# Altium PCB PCB1.PcbDoc
Units mil, origin at the board's own origin, x right, y up, seen from the top; angles counter-clockwise.
Board outline 6270 x 4720 mil, 2 copper layers (Top Layer, Bottom Layer); 25 components, 55 nets, 239 pads, 21 vias.
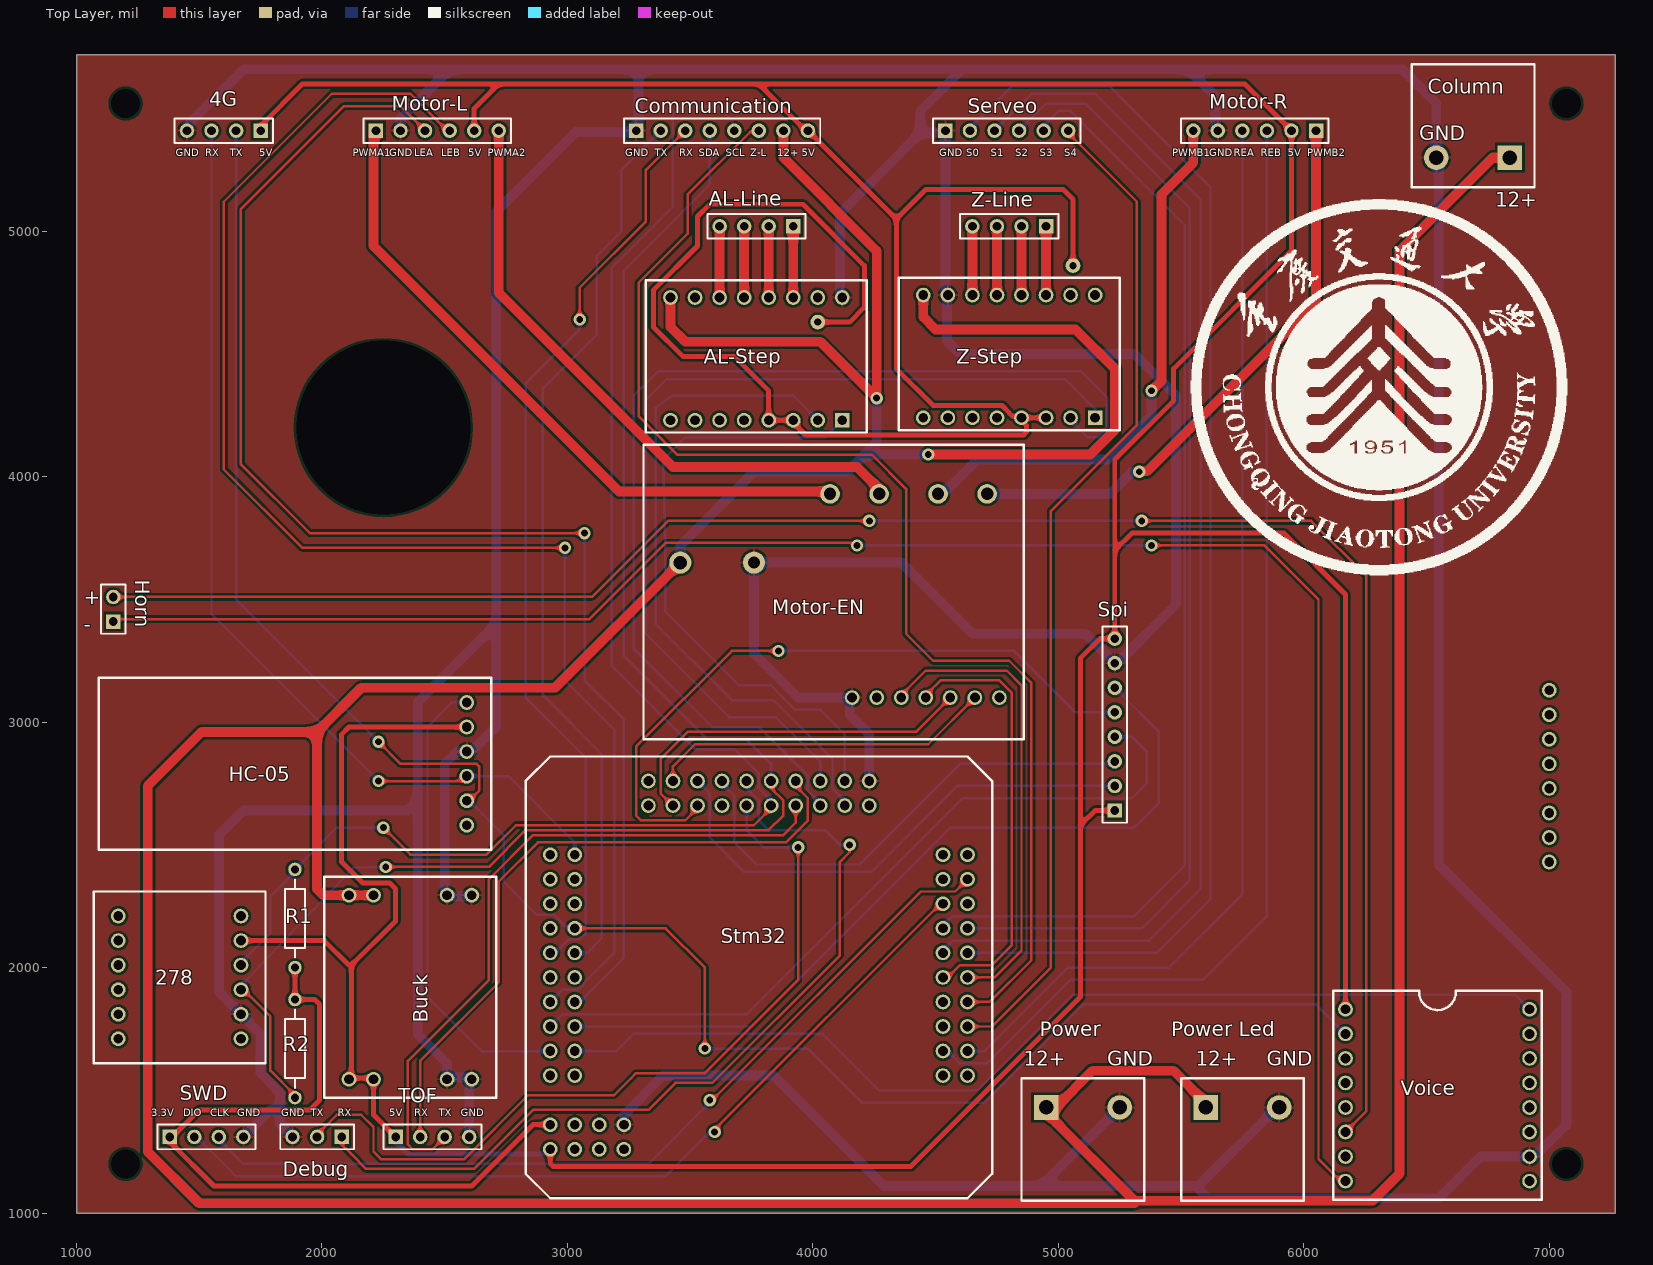
[diagram p0: Top Layer view]
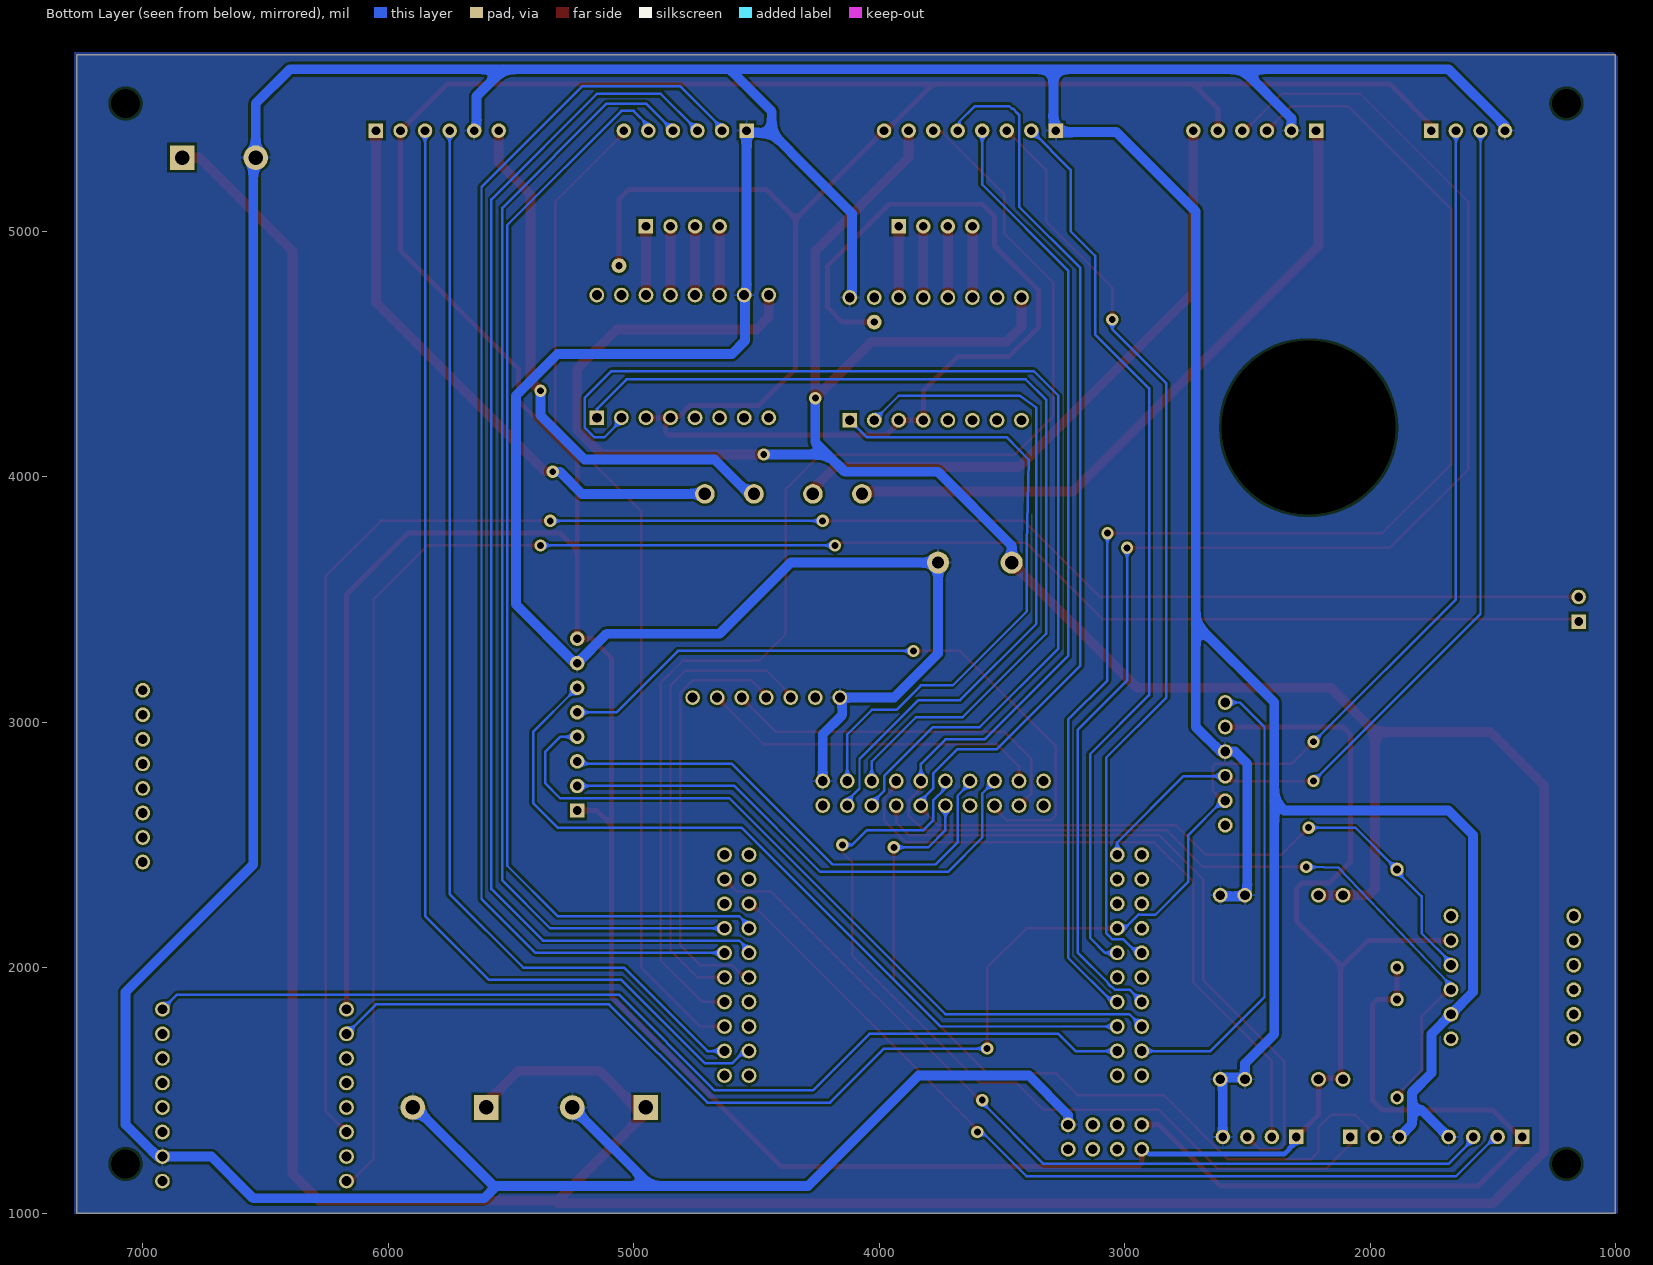
[diagram p1: Bottom Layer view, seen from below]

## Layer stack, top to bottom
Top Solder: solder mask 0.4, Solder Resist, Dk 3.5
Top Layer: signal copper 1.4
Dielectric 1: dielectric 12.6, FR-4, Dk 4.8
Bottom Layer: signal copper 1.4
Bottom Solder: solder mask 0.4, Solder Resist, Dk 3.5

## Board outline
1000,1000 1000,5720 7270,5720 7270,1000

## Design rules (kind name [scope] priority, off if disabled: settings)
Clearance [All] p1: gap=10 ignorepadtopadclearanceinfootprint=FALSE except(0: Arc-Hole Track-Hole SMDPad-Hole THPad-Hole Via-Hole Fill-Hole Poly-Hole Region-Hole Text-Hole)
PolygonConnect [All] p1: connectstyle=Relief reliefconductorwidth=10 reliefentries=4 polygonreliefangle="90 Angle" airgapwidth=10
RoutingVias [All] p1: holewidth=28 width=50 viastyle="Through Hole" minholewidth=28 minwidth=50 maxholewidth=28 maxwidth=50
SolderMaskExpansion [All] p1: expansion=4 istentingtop=FALSE
Width [All] p1: maxlimit=40 minlimit=10 preferedwidth=10 minimp=50.000000 maximp=50.000000 favimp=50.000000
30 further rules are at their usual default settings.

## Components (designator, comment, footprint, x,y, rotation, side; value= is the part's Value field where it differs from the comment)
4G "Header 4" HDR1X4 1750,5410 r180 top
278 "0" 278 1370,2310 r0 top
AL-Line "Header 4" HDR1X4 3920,5020 r180 top (schematic designator AL-LINE)
AL-Step "8825" 8825 3420,4230 r90 top (schematic designator AL-STEP)
Buck "buck" 5V 2310,2170 r0 top (schematic designator buck)
Column "column" "key - duplicate" 6840,5300 r180 top (schematic designator column)
Communication "Header 8" HDR1X8 3280,5410 r0 top (schematic designator COMMUNICATION)
Debug "Header 3" HDR1X3 2080,1310 r180 top (schematic designator test)
HC-05 "bluetooth" "blue key" 2490,2780 r180 top
Horn "Header 2" HDR1X2 1150,3410 r90 top (schematic designator horn)
Motor-EN "L298" L298N 4560,3730 r270 top (schematic designator MOTOR-EN)
Motor-L "Header 6" HDR1X6 2220,5410 r0 top (schematic designator MOTOR-L)
Motor-R "Header 6" HDR1X6 6050,5410 r180 top (schematic designator MOTOR-R)
Power "Header 2" "key - duplicate" 4950,1430 r0 top (schematic designator POWER)
"Power Led" "Header 2" "key - duplicate" 5600,1430 r0 top (schematic designator "POWER LED")
R1 "" AXIAL-0.4 1890,2200 r90 top value=4.7K
R2 "" AXIAL-0.4 1890,1670 r270 top value=4.7K
Serveo "Header 6" HDR1X6 4540,5410 r0 top (schematic designator serve)
Spi "Header 8" HDR1X8 5230,2640 r90 top (schematic designator SPI)
Stm32 "srm32" stm32 3530,2460 r0 top (schematic designator stm32)
SWD "Header 4" HDR1X4 1380,1310 r0 top
TOF "Header 4" HDR1X4 2300,1310 r0 top
Voice "yuyin1" horn 6270,1730 r0 top (schematic designator yuyin)
Z-Line "Header 4" HDR1X4 4950,5020 r180 top (schematic designator Z-LINE)
Z-Step "8825" 8825 4450,4240 r90 top (schematic designator Z-STEP)

## Footprints (in the part's own frame and the unit in brackets; to place one, negate y for a bottom-side part, rotate by r counter-clockwise, add the part's x,y. Pads: shape width x height; smd on the part's side, far side on the other; paste and mask are expansions set on the pad)
5V [mil]
  round 60 hole 40: vin+(-200,125) vin+(-100,125) vin-(200,125) vin-(300,125) vout+(-200,-625) vout+(-100,-625) vout-(200,-625) vout-(300,-625)
  silkscreen extent -300,-700 400,200
278 [mil]
  round 60 hole 40: D0(-200,-100) D1(-200,-600) D2(300,-100) D3(300,-600) GND(-200,-500) GND(300,-500) RX(-200,-300) SCL(300,-300) SDA(300,-400) TX(-200,-400) VCC(-200,-200) VCC(300,-200)
  silkscreen extent -300,-700 400,0
8825 [mil]
  round 60 hole 40: 1A(500,-400) 1B(500,-300) 2A(500,-500) 2B(500,-200) EN(0,0) FLT(500,-600) GND(500,-100) GND(500,-700) M0(0,-100) M1(0,-200) M2(0,-300) RST(0,-400) SLEP(0,-500) STEP(0,-600) VMOT(500,0)
  rect 60x60 hole 40: DIR(0,-700)
  silkscreen extent -50,-800 570,100
AXIAL-0.4 [mm] "Axial Device, Thru-Hole; 2 Leads; 0.4 in Pin Spacing"
  round 1.4 hole 0.85: 1(-5.08,0) 2(5.08,0)
  silkscreen extent -4.06,-1.02 4.06,1.02
"blue key" [mil]
  round 60 hole 40: EN(-100,-300) GND(-100,-100) RX(-100,100) STATE(-100,200) TX(-100,0) VCC(-100,-200)
  silkscreen extent -200,-400 1400,300
HDR1X2 [mm] "Connector; Header; 2 Position"
  rect 1.5x1.5 hole 0.9: 1(0,0)
  round 1.5 hole 0.9: 2(2.54,0)
  silkscreen extent -1.27,-1.27 3.81,1.27
HDR1X3 [mm] "Connector; Header; 3 Position"
  rect 1.5x1.5 hole 0.9: 1(0,0)
  round 1.5 hole 0.9: 2(2.54,0) 3(5.08,0)
  silkscreen extent -1.27,-1.27 6.35,1.27
HDR1X4 [mm] "Connector; Header; 4 Position"
  rect 1.5x1.5 hole 0.9: 1(0,0)
  round 1.5 hole 0.9: 2(2.54,0) 3(5.08,0) 4(7.62,0)
  silkscreen extent -1.27,-1.27 8.89,1.27
HDR1X6 [mm] "Connector; Header; 6 Position"
  rect 1.5x1.5 hole 0.9: 1(0,0)
  round 1.5 hole 0.9: 2(2.54,0) 3(5.08,0) 4(7.62,0) 5(10.16,0) 6(12.7,0)
  silkscreen extent -1.27,-1.27 13.97,1.27
HDR1X8 [mm] "Connector; Header; 8 Position"
  rect 1.5x1.5 hole 0.9: 1(0,0)
  round 1.5 hole 0.9: 2(2.54,0) 3(5.08,0) 4(7.62,0) 5(10.16,0) 6(12.7,0) 7(15.24,0) 8(17.78,0)
  silkscreen extent -1.27,-1.27 19.05,1.27
horn [mil]
  round 60 hole 40: ADKEY1(650,-300) ADKEY2(650,-200) BUSY(650,100) DACL(-100,-300) DACR(-100,-200) GND(-100,-500) GND(650,-500) IO1(650,-600) IO2(650,-400) RX(-100,0) SPK+(-100,-400) SPK-.(-100,-600) TX(-100,-100) USB+(650,-100) USB-(650,0) VCC(-100,100)
  silkscreen extent -150,-675 700,176
"key - duplicate" [mm]
  rect 2.54x2.54 hole 1.5: 12V(0,0)
  round 2.54 hole 1.5: GND(7.62,0)
  silkscreen extent -2.54,-9.65 10.16,3.05
L298N [mil]
  round 60 hole 40: 3.3(630,-300) D0(630,-200) D1(630,-100) D2(630,0) D3(630,100) GND(630,-400) VT(630,200)
  round 90 hole 55: 12+(80,-1100)
  round 90 hole 50: GND(80,-800)
  round 80 hole 50: PWMA1(-200,-490) PWMA2(-200,-290) PWMB1(-200,-50)
  round 80 hole 50 mask+4: PWMB2(-200,150)
  silkscreen extent -400,-1250 800,300
stm32 [mil]
  round 60 hole 40: 3.3V(-600,-1100) 3.3V(-200,200) 3.3V(1100,-900) 5V(-600,-1200) 5V(700,200) 5V(1100,0) A0(1100,-800) A1(1000,-800) A2(1100,-700) A3(1000,-700) A4(1100,-600) A5(1000,-600) A6(1100,-500) A7(1000,-500) A8(1100,-400) A9(1000,-400) A10(1100,-300) A11(1000,-300) A12(1100,-200) A13(1000,-200) A14(1100,-100) A15(1000,-100) B0(-100,200) B1(-100,300) B2(0,200) B3(0,300) B4(100,200) B5(100,300) B6(200,200) B7(200,300) B8(300,200) B9(300,300) B10(400,200) B11(400,300) B12(500,200) B13(500,300) B14(600,200) B15(600,300) C0(-500,-900) C1(-600,-900) C2(-500,-800) C3(-600,-800) C4(-500,-700) C5(-600,-700) C6(-500,-600) C7(-600,-600) C8(-500,-500) C9(-600,-500) C10(-500,-400) C11(-600,-400) C12(-500,-300) C13(-600,-300) C14(-500,-200) C15(-600,-200) CLK(-400,-1100) D2(-500,0) DIO(-500,-1100) GND(-600,0) GND(-300,-1200) GND(-300,-1100) GND(-200,300) GND(700,300) GND(1000,-900) GND(1000,0) RST(-600,-100) RX(-500,-1200) TX(-400,-1200) VBAT(-500,-100)
  silkscreen extent -700,-1400 1200,400

## Part data
4G AL-Line SWD TOF Z-Line: "Header, 4-Pin", LatestRevisionDate=17-Jul-2002, LatestRevisionNote="Re-released for DXP Platform.", Publisher="Altium Limited"
278: library part 278
Communication Spi: "Header, 8-Pin", LatestRevisionDate=17-Jul-2002, LatestRevisionNote="Re-released for DXP Platform.", Publisher="Altium Limited"
Debug: "Header, 3-Pin", LatestRevisionDate=17-Jul-2002, LatestRevisionNote="Re-released for DXP Platform.", Publisher="Altium Limited"
Horn Power "Power Led": "Header, 2-Pin", LatestRevisionDate=17-Jul-2002, LatestRevisionNote="Re-released for DXP Platform.", Publisher="Altium Limited"
Motor-L Motor-R Serveo: "Header, 6-Pin", LatestRevisionDate=17-Jul-2002, LatestRevisionNote="Re-released for DXP Platform.", Publisher="Altium Limited"
R1 R2: library part Res2, "Resistor", LatestRevisionDate=17-Jul-2002, LatestRevisionNote="Re-released for DXP Platform.", PackageDescription="Axial Device, Thru-Hole; 2 Leads; 0.4 in Pin Spacing", PackageReference=AXIAL-0.4, Published=8-Jun-2000, Publisher="Altium Limited"

## Free pads (board coordinates)
  round 60 hole 118.11: 131(7070,5520) 133(1200,1200) 134(1200,5520) 135(7070,1200)
  round 60 hole 40: 136(7000,3130) 137(7000,3030) 138(7000,2930) 139(7000,2830) 140(7000,2730) 141(7000,2630) 142(7000,2530) 143(7000,2430)
  round 60 hole 708.66: 144(2250,4200)
  round 60 hole 30: 146(5060,4860) 147(4020,4630)

## Via types
v1: diameter 50, hole 28, Top Layer to Bottom Layer, 21 vias

## Nets (pads, with @x,y where several pads share a name; then routed paths per layer and width w, separated by ;. In a path a pad name is that pad's centre, name@x,y a point inside that pad or via, vN(x,y) a via of type N, cw(c..) or ccw(c..) an arc to the next point about the centre after c; other vN are vias at no path point)
3.3V: R1.1 R2.1 Stm32.3.3V@2930,1360 SWD.1 | length 3018.5
  Top Layer w20: SWD.1@1380,1290 1560,1110 2610,1110 2860,1360 Stm32.3.3V@2930,1360 ; SWD.1@1390,1310 1500,1420 1950,1420 1990,1460 1990,1850 1970,1870 R2.1 R1.1
5V: 4G.1 278.VCC@1670,2110 AL-Step.RST AL-Step.SLEP Buck.vout+ Communication.8 HC-05.VCC Motor-L.5 Motor-R.2 pad.146 pad.147 Spi.1 Spi.8 Stm32.5V@2930,1260 TOF.1 Voice.VCC Z-Step.RST Z-Step.SLEP | length 24337.5
  Top Layer w20: 278.VCC@1670,2110 2010,2110 2110,2010 2120,2010 ; 4G.1@1750,5430 1920,5600 2720,5600 ; TOF.1 2210,1400 2210,1545 2205,1550 2120,1550 2120,2010 ; HC-05.VCC 2110,2980 2080,2950 2080,2430 2165,2345 2275,2345 2300,2320 2300,2190 2120,2010 ; Motor-L.5 2620,5500 2720,5600 ; Stm32.5V@2930,1260 2930,1201.72 2941.72,1190 4400,1190 5090,1880 5090,2580 ; AL-Step.SLEP@3905.02,4234.98 AL-Step.SLEP@3910,4230 ; AL-Step.SLEP@3915,4225 3970,4170 4858.28,4170 4870,4181.72 4870,4209.18 4850,4229.18 Z-Step.RST ; AL-Step.SLEP AL-Step.SLEP@3910,4230 ; Communication.8@3975,5405 3780,5600 ; Communication.8 4340,5050 ; pad.147 4150,4630 4210,4690 4210,4860 3960,5110 3580,5110 3530,5060 3530,4940 3350,4760 3350,4610 3470,4490 3680,4490 3820,4350 AL-Step.RST AL-Step.SLEP@3910,4230 ; Z-Step.SLEP@4941.85,4240 Z-Step.RST ; pad.146@5060,4850 5060,5130 5020,5170 4460,5170 4340,5050 ; Spi.1 5150,2640 5090,2580 ; Motor-R.2@5950,5400 5950,4920 5470,4440 5470,4310 5230,4070 5230,3700 ; Motor-R.2@5955,5405 Motor-R.2 5760,5600 3780,5600 ; Voice.VCC 6170,3520 5920,3770 5300,3770 5230,3700 ; 2720,5600 3780,5600 ; 4340,5050 4340,4440 4490,4290 4770.71,4290 4800,4260.71 4800,4258.28 4811.72,4246.57 4843.43,4246.57 Z-Step.RST ; 5090,2580 5090,3260 5170,3340 Spi.8 5230,3700
  Bottom Layer w20: TOF.1 2300,1290 2350,1240 2899.18,1240 2919.18,1260 Stm32.5V@2930,1260
AL-DIR: AL-Step.DIR Stm32.B15 | length 2543.7
  Bottom Layer w10: AL-Step.DIR 4050,4160 3479.34,4160 3390.59,4069.25 3390.69,4065.04 3398.29,3725.77 3398.29,3725.66 3398.29,3568.85 3398.29,3451.71 3700,3150 3830,3150 3930,3050 4030,3050 4130,2950 Stm32.B15
AL-STEP: AL-Step.STEP Stm32.B14 | length 2756.9
  Bottom Layer w10: AL-Step.STEP 3920,4330 3428.06,4330 3360.22,4281.64 3360,4281.01 3360,3500.31 3360,3400 3670,3090 3840,3090 4080,2850 4080,2730 4130,2680 Stm32.B14
GND: 4G.4 278.GND@1670,1810 "Power Led.GND" AL-Step.GND@4120,4730 Buck.vin- Buck.vout- Column.GND Communication.1 Debug.3 HC-05.GND Motor-EN.GND Motor-L.2 Motor-R.5 Power.GND Serveo.1 Spi.7 Stm32.GND@3230,1360 Stm32.GND@4230,2760 SWD.4 TOF.4 Voice.GND@6920,1230 Z-Step.GND@4550,4740 | length 31287.4
  Bottom Layer w40: 4G.4@1450,5430 1680,5660 2520,5660 ; SWD.4 1790,1420 1830,1420 ; Debug.3 1830,1360 1830,1420 ; Motor-L.2 2320,5460 2520,5660 ; HC-05.GND 2550,2880 2500,2830 2500,2301.72 2511.72,2290 Buck.vin-@2607.17,2290 ; TOF.4 2600,1552.65 2517.35,1552.65 2510,1560 2510,1610 2390,1730 2390,2680 ; HC-05.GND@2610,2880 2710,2980 2710,3400 ; Stm32.GND@3230,1360 3230,1400 3390,1560 3840,1560 4290,1110 4930,1110 ; AL-Step.GND@4110,4730 4110,5072.82 4287.18,5250 4437.19,5400 ; Stm32.GND@4230,2760 4230,2950 4150,3030 4150,3100 3940,3100 3760,3280 3760,3650 4360,3650 4650,3360 5110,3360 Spi.7 ; 4600,5650 4437.19,5487.19 4437.19,5400 ; Power.GND@5230,1410 4930,1110 ; Spi.7@5240,3240 5480,3480 5480,4330 5310,4500 4600,4500 4546.17,4553.83 4546.17,4734.59 4540.76,4740 4546.17,4745.41 4546.17,4749.24 4540,4755.41 Serveo.1 4532.19,5402.19 4492.19,5402.19 4490,5400 4437.19,5400 ; Motor-R.5@5640,5410 5640,5550 5530,5660 ; 5910,1420 5880,1420 5570,1110 5560,1110 ; Column.GND@6540,5290 Column.GND 6540,5520 6400,5660 5530,5660 ; Column.GND@6550,5290 6550,2420 7070,1900 7070,1360 Voice.GND@6940,1230 ; Voice.GND@6920,1230 6720,1230 6550,1060 5610,1060 5560,1110 ; 1830,1420 1830,1490 1750,1570 1750,1730 1670,1810 1580,1900 1580,2540 1680,2640 2350,2640 2390,2680 ; 2390,2680 2390,3080 2710,3400 ; 2520,5660 3290,5660 ; 2710,3400 2710,5080 3033.89,5403.89 3264.36,5403.89 3290,5429.53 3290,5660 ; 3290,5660 4600,5660 5530,5660 ; 4930,1110 5560,1110
HC05-EN: HC-05.EN Stm32.C3 | length 1892.5
  Bottom Layer w10: HC-05.EN 2530,3080 2430,2980 2430,1880 2650,1660 Stm32.C3
IIC-SCL: 278.SCL Communication.5 R1.2 Stm32.B8 | length 6209.3
  Top Layer w10: v1(2250,2570) 2360,2460 2670,2460 2790,2580 3760,2580 Stm32.B8@3829.31,2649.31
  Bottom Layer w10: 278.SCL 1670,2020 1790,2140 1790,2290 R1.2@1890,2390 ; R1.2 2060,2570 v1(2250,2570) ; Communication.5 3673.51,5416.49 3673.51,5446.49 3610,5510 3470,5510 3459.51,5499.51 3455.37,5499.51 3435.86,5480 3430,5474.14 3430,5100 3180,4850 3180,3410 3180,3230 3520,2890 3680,2890 3780,2790 3780,2730 3830,2680 Stm32.B8
IIC-SDA: 278.SDA Communication.4 R2.2 Stm32.B9 | length 6330.6
  Top Layer w10: 278.SDA 1680,1910 1790,1800 1790,1580 1890,1480 R2.2 ; v1(2260,2410) 2680,2410 2830,2560 3820,2560 3880,2620 3880,2680 3830,2730 Stm32.B9@3830,2750
  Bottom Layer w10: 278.SDA@1680,1910 1679.99,1910.24 1679.36,1936.33 2127.63,2407.02 v1@2250,2410 ; Communication.4 3580,5190 3230,4840 3230,4655.88 3230,3420 3230,3270 3570,2930 3730,2930 3830,2830 3830,2820 Stm32.B9
L-ENchod-A: Motor-L.3 Stm32.C6 | length 5582.3
  Top Layer w10: Motor-L.3@2412.99,5417.01 2320,5510 2090,5510 1670,5090 1670,4050 1950,3770 v1(3070,3770)
  Bottom Layer w10: Stm32.C6 3050,1860 3230,2040 3230,3010 3070,3170 v1(3070,3770)
L-ENchod-B: Motor-L.4 Stm32.C7 | length 5841.8
  Top Layer w10: Motor-L.4@2509.01,5410.99 2360,5560 2040,5560 1600,5120 1600,4030 1920,3710 v1(2990,3710)
  Bottom Layer w10: Stm32.C7 2980,1910 3040,1910 3049.39,1919.39 ccw(c3030,1960) 3070.61,1940.61 3190,2060 3190,2970 2990,3170 v1(2990,3710)
LINUX-RX: Communication.3 Stm32.C11 | length 3812.2
  Top Layer w10: v1(3050,4640) 3050,4770 3320,5040 3320,5250 Communication.3
  Bottom Layer w10: Stm32.C11@2940,2050 3005,2115 3048.64,2115 3075,2141.36 3075,2855 2830,3100 2830,4380 3050,4600 v1(3050,4640)
LINUX-TX: Communication.2 Stm32.C10 | length 3722.8
  Bottom Layer w10: Stm32.C10 3079.5,2060 3140,2120.5 3140,2870 2900,3110 2900,4360 3120,4580 3120,4900 3220,5000 3220,5250 Communication.2
Motor-D0: Motor-EN.D0 Stm32.A6 | length 1901.8
  Top Layer w10: Motor-EN.D0@4360,3110 4460,3210 4790,3210 4850,3150 4850,2070 4740,1960 Stm32.A6
Motor-D1: Motor-EN.D1 Stm32.A7 | length 1755.3
  Top Layer w10: Motor-EN.D1@4460,3120 4470,3120 4520,3170 4760,3170 4810,3120 4810,2090 4730,2010 4600,2010 4550,1960 Stm32.A7
motor-D2: Motor-EN.D2 Stm32.B0 | length 1480.1
  Top Layer w10: Stm32.B0 3380,2710 3380,2850 3490,2960 4420,2960 Motor-EN.D2@4550,3090
motor-D3: Motor-EN.D3 Stm32.B1 | length 1406
  Top Layer w10: Stm32.B1 3430,2820 3520,2910 4470,2910 Motor-EN.D3
NetAL-LINE_1: AL-Line.1 AL-Step.2A | length 290
  Top Layer w40: AL-Step.2A AL-Line.1
NetAL-LINE_2: AL-Line.2 AL-Step.1A | length 270
  Top Layer w40: AL-Step.1A@3820,4750 AL-Line.2
NetAL-LINE_3: AL-Line.3 AL-Step.1B | length 260
  Top Layer w40: 3720,4760 AL-Line.3
NetAL-LINE_4: AL-Line.4 AL-Step.2B | length 270
  Top Layer w40: AL-Step.2B@3620,4750 AL-Line.4
NetZ-LINE_1: Z-Line.1 Z-Step.2A | length 280
  Top Layer w40: Z-Step.2A Z-Line.1
NetZ-LINE_2: Z-Line.2 Z-Step.1A | length 240
  Top Layer w40: Z-Step.1A@4850,4760 Z-Line.2@4850,5000
NetZ-LINE_3: Z-Line.3 Z-Step.1B | length 250
  Top Layer w40: 4750,4770 Z-Line.3
NetZ-LINE_4: Z-Line.4 Z-Step.2B | length 250
  Top Layer w40: 4650,4770 Z-Line.4
POWER+: "Power Led.12V" AL-Step.VMOT Buck.vin+ Column.12V Communication.7 Motor-EN.12+ Power.12V Z-Step.VMOT | length 21608.4
  Top Layer w40: Buck.vin+@2210.33,2295 2110,2295 2005,2295 1980,2320 1980,2960 ; AL-Step.VMOT@3420,4720 3420,4610 3480,4550 4030,4550 v1@4250,4330 ; Motor-EN.12+ 2950,3140 2160,3140 1980,2960 ; Communication.7 3880,5300 4260,4920 v1(4260,4320) ; Z-Step.VMOT 4450,4650 4500,4600 5070,4600 5230,4440 5230,4190 5130,4090 v1(4470,4090) ; 5310,1040 1500,1040 1290,1250 1290,2740 1510,2960 1980,2960 ; 5610,1440 5470,1580 5140,1580 4990,1430 4960,1430 4960,1400 5310,1050 5320,1050 6280,1050 6330,1100 6390,1160 6390,4920 6770,5300 Column.12V
  Bottom Layer w40: Motor-EN.12+ 3460,3720 3760,4020 4140,4020 4210,4090 ; v1(4260,4320) 4260,4140 4210,4090 ; v1(4470,4090) 4210,4090
PWMA1: Motor-EN.PWMA1 Motor-L.1 | length 2754.2
  Top Layer w40: Motor-L.1@2210,5410 2210,4940 3210,3940 Motor-EN.PWMA1@4080,3940
PWMA2: Motor-EN.PWMA2 Motor-L.6 | length 2527.2
  Top Layer w40: Motor-L.6 2720,4750 3430,4040 4180,4040 Motor-EN.PWMA2@4260,3960
PWMB1: Motor-EN.PWMB1 Motor-R.6 | length 2233
  Top Layer w40: v1(5380,4350) 5420,4390 5420,5150 5550,5280 Motor-R.6
  Bottom Layer w40: Motor-EN.PWMB1 4530,3930 4670,4070 5200,4070 5380,4250 v1(5380,4350)
PWMB2: Motor-EN.PWMB2 Motor-R.1 | length 2363.1
  Top Layer w40: v1(5330,4020) 5331.91,4021.91 5361.91,4021.91 6050,4710 Motor-R.1
  Bottom Layer w40: Motor-EN.PWMB2 5210,3930 5300,4020 v1(5330,4020)
R-ENcoder-A: Motor-R.4 Stm32.A0 | length 4495.1
  Bottom Layer w10: Stm32.A0 4700,1660 5040,2000 5450,2000 5750,2300 Motor-R.4
R-ENcoder-B: Motor-R.3 Stm32.A1 | length 4789.2
  Bottom Layer w10: Stm32.A1 4550,1660 4600,1610 4710,1610 5050,1950 5590,1950 5850,2210 Motor-R.3
Servo0: Serveo.2 Stm32.A8 | length 5201.4
  Bottom Layer w10: Stm32.A8 5400,2060 5620,2280 5620,5180 5210,5590 4810,5590 Serveo.2@4640,5420
Servo1: Serveo.3 Stm32.A9 | length 5039.7
  Bottom Layer w10: Stm32.A9 4530,2070 4570,2110 5370,2110 5580,2320 5580,5130 5150,5560 4890,5560 Serveo.3@4750,5420
Servo2: Serveo.4 Stm32.A10 | length 4642.4
  Bottom Layer w10: Stm32.A10 5340,2160 5535,2355 5535,5095 5110,5520 4950,5520 Serveo.4
Servo3: Serveo.5 Stm32.A11 | length 4498.9
  Bottom Layer w10: Stm32.A11 4530,2170 4570,2210 5310,2210 5515,2415 5515,5025 5050,5490 5000,5490 Serveo.5@4940,5430
Servo4: Serveo.6 Stm32.A2 | length 4116.9
  Top Layer w10: Stm32.A2 4730,1760 4970,2000 4970,3860 5320,4210 5320,5120 Serveo.6@5028.29,5411.71
SPI-MOSI: Spi.3 Stm32.B5 | length 2037.8
  Bottom Layer w10: Stm32.B5 3630,2750 3680,2700 3680,2510 3770,2420 4190,2420 4600,2830 Spi.3@5240,2830
SPI-SCK: Spi.2 Stm32.B3 | length 2089.5
  Bottom Layer w10: Stm32.B3@3540,2750 3580,2710 3580,2530 3720,2390 4240,2390 4590,2740 Spi.2
SPK+: Horn.2 Voice.SPK+ | length 7626.8
  Top Layer w10: Horn.2 3100,3510 3410,3820 v1(4230,3820) ; v1(5340,3820) 6030,3820 6255,3595 6255,1415 Voice.SPK+
  Bottom Layer w10: v1(4230,3820) v1(5340,3820)
SPK-: Horn.1 Voice.SPK-. | length 7577.9
  Top Layer w10: Horn.1@1140,3420 3090,3420 3400,3730 4154.14,3730 4156.49,3727.65 4172.35,3727.65 v1(4180,3720) ; v1(5380,3720) 5840,3720 6060,3500 6060,1220 6150,1130 Voice.SPK-.
  Bottom Layer w10: v1(4180,3720) v1(5380,3720) ; Voice.SPK-. Voice.SPK-.@6170,1136.9
SSD-A0: Spi.4 Stm32.C5 | length 3124.9
  Bottom Layer w10: Stm32.C5 2980,1810 3730,1810 4610,2690 5300,2690 5360,2750 5360,2880 5300,2940 Spi.4
SSD-CS: Spi.6 Stm32.C4 | length 3287.4
  Bottom Layer w10: Stm32.C4 3750,1760 4560,2570 5310,2570 5410,2670 5410,2960 Spi.6@5240,3130
SSD-RST: Spi.5 Stm32.B2 | length 2764.1
  Top Layer w10: Stm32.B2 3530,2650 3480,2600 3300,2600 3280,2620 3280,2900 3670,3290 v1@3850,3290
  Bottom Layer w10: v1@3870,3290 4820,3290 5070,3040 Spi.5
  other v1: 3860,3290
SWCLK: Stm32.A14 SWD.3 | length 3573.6
  Top Layer w10: v1(3580,1460) 3590,1460 4440,2310 4580,2310 Stm32.A14@4620,2350
  Bottom Layer w10: SWD.3 1580,1300 1680,1200 3330,1200 3580,1450 v1(3580,1460)
SWDIO: Stm32.A13 SWD.2 | length 3571.9
  Top Layer w10: v1(3600,1330) 3600,1340 Stm32.A13@4520,2260
  Bottom Layer w10: SWD.2 1490,1310 1650,1150 3400,1150 3580,1330 v1(3600,1330)
TOF-RX: Stm32.B11 TOF.2 | length 2716.8
  Top Layer w10: TOF.2 2400,1620 2720,1940 2720,2350 2880,2510 3890,2510 3980,2600 3980,2690 3930,2740 Stm32.B11
TOF-TX: Stm32.B10 TOF.3 | length 2811
  Top Layer w10: TOF.3 2450,1260 2370,1260 2350,1280 2350,1620 2680,1950 2680,2360 2860,2540 3880,2540 3930,2590 Stm32.B10
U1-RX: Debug.1 Stm32.B7 | length 3504.6
  Top Layer w10: Debug.1@2070,1290 2120,1240 2180,1180 2620,1180 2860,1420 3330,1420 3440,1530 3590,1530 4110,2050 4110,2430 4150,2470 v1(4150,2500)
  Bottom Layer w10: Stm32.B7 3730,2730 3780,2680 3780,2600 3820,2560 4050,2560 4110,2500 v1(4150,2500)
U1-TX: Debug.2 Stm32.B6 | length 3308.3
  Top Layer w10: Debug.2@1979.53,1319.53 2060,1400 2160,1400 2210,1350 2210,1250 2240,1220 2580,1220 2840,1480 3190,1480 3260,1550 3280,1570 3560,1570 3940,1950 v1(3940,2490)
  Bottom Layer w10: Stm32.B6 3730,2560 3800,2490 v1(3940,2490)
U5-RX: 4G.3 HC-05.TX Stm32.D2 | length 3921.8
  Top Layer w10: v1(2230,2760) 2570,2760 HC-05.TX
  Bottom Layer w10: 4G.3@1550,5430 1550,3440 v1(2230,2760) ; HC-05.TX 2760,2780 3030,2510 Stm32.D2
U5-TX: 4G.2 HC-05.RX Stm32.C12 Voice.RX | length 7948.7
  Top Layer w10: v1(2230,2920) 2320,2830 2630,2830 2640,2820 2640,2720 2600,2680 HC-05.RX ; Stm32.C12 3400,2160 3560,2000 v1@3560,1680
  Bottom Layer w10: 4G.2@1650,5420 1650,3500 v1(2230,2920) ; HC-05.RX@2600,2680 2740,2540 2740,2350 2875,2215 2930,2215 ccw(c2930,2260) 2943.06,2216.94 3000,2160 Stm32.C12 ; v1(3560,1670) 3980,1670 4200,1450 4700,1450 5100,1850 6050,1850 Voice.RX
YUYIN: Stm32.C2 Voice.BUSY | length 4180.7
  Bottom Layer w10: Stm32.C2@3050,1660 3200,1660 3270,1730 4040,1730 4270,1500 4670,1500 5060,1890 6860,1890 Voice.BUSY
Z-DIR: Stm32.B13 Z-Step.DIR | length 3899.6
  Bottom Layer w10: Stm32.B13 4030,2840 3850,3020 3660,3020 3320,3360 3320,3456.63 3320,4314.01 3402.48,4396.49 5029.77,4396.49 5150,4276.26 Z-Step.DIR@5150,4250
Z-limite: Communication.6 Stm32.A4 | length 5220.9
  Top Layer w10: Communication.6@3761.71,5407.88 3757.34,5403.51 3743.51,5403.51 3490,5150 3490,4990 3290,4790 3290,4246.57 3446.57,4090 4240,4090 4380,3950 4380,3360 4490,3250 4800,3250 4890,3160 4890,2030 4720,1860 Stm32.A4
Z-STEP: Stm32.B12 Z-Step.STEP | length 4442.2
  Bottom Layer w10: Stm32.B12 4030,2670 3980,2720 3980,2780 3780,2980 3590,2980 3270,3300 3270,3446.79 3270,4330 3370,4430 5090,4430 5200,4320 5200,4200 5160,4160 5120,4160 Z-Step.STEP@5050,4230 ; Z-Step.STEP Z-Step.STEP@5059.57,4249.57
pads on no net: 278.D0 278.D1 278.D2 278.D3 278.GND@1170,1810 278.RX 278.TX 278.VCC@1170,2110 AL-Step.EN AL-Step.FLT AL-Step.GND@3520,4730 AL-Step.M0 AL-Step.M1 AL-Step.M2 HC-05.STATE Motor-EN.3.3 Motor-EN.VT Stm32.3.3V@3330,2660 Stm32.3.3V@4630,1560 Stm32.5V@4230,2660 Stm32.5V@4630,2460 Stm32.A3 Stm32.A5 Stm32.A12 Stm32.A15 Stm32.B4 Stm32.C0 Stm32.C1 Stm32.C8 Stm32.C9 Stm32.C13 Stm32.C14 Stm32.C15 Stm32.CLK Stm32.DIO Stm32.GND@2930,2460 Stm32.GND@3230,1260 Stm32.GND@3330,2760 Stm32.GND@4530,1560 Stm32.GND@4530,2460 Stm32.RST Stm32.RX Stm32.TX Stm32.VBAT Voice.ADKEY1 Voice.ADKEY2 Voice.DACL Voice.DACR Voice.GND@6170,1230 Voice.IO1 Voice.IO2 Voice.TX Voice.USB+ Voice.USB- Z-Step.EN Z-Step.FLT Z-Step.GND@5150,4740 Z-Step.M0 Z-Step.M1 Z-Step.M2

## Polygon pours and split planes (outlines as drawn)
GND on Bottom Layer "GND_L02_P000" (solid, pour order 0): 990,5710 1010,5730 7280,5730 7280,990 7270,1000 990,1000
GND on Top Layer "GND_L01_P001" (solid, pour order 1): 1000,5720 7270,5720 7270,1000 1000,1000

## Silkscreen, mask and mechanical layers (free items; w line width, h text height)
Top Overlay:
  drawing of 4483 lines, arcs and shapes, not listed
  text "GND" at 6470,5370 h60
  text "GND" at 1405,5305 h30
  text "RX" at 1525,5305 h30
  text "TX" at 1625,5305 h30
  text "5V" at 1745,5305 h30
  text "PWMA1" at 2125,5305 h30
  text "GND" at 2275,5305 h30
  text "LEA" at 2375,5305 h30
  text "LEB" at 2485,5305 h30
  text "5V" at 2595,5305 h30
  text "PWMA2" at 2675,5305 h30
  text "GND" at 3235,5305 h30
  text "TX" at 3355,5305 h30
  text "RX" at 3455,5305 h30
  text "SDA" at 3535,5305 h30
  text "SCL" at 3645,5305 h30
  text "Z-L" at 3745,5305 h30
  text "12+" at 3855,5305 h30
  text "5V" at 3955,5305 h30
  text "GND" at 4515,5305 h30
  text "S0" at 4625,5305 h30
  text "S1" at 4725,5305 h30
  text "S2" at 4825,5305 h30
  text "S3" at 4925,5305 h30
  text "S4" at 5024.14,5305 h30
  text "PWMB1" at 5465,5305 h30
  text "GND" at 5615,5305 h30
  text "REA" at 5715,5305 h30
  text "REB" at 5825,5305 h30
  text "5V" at 5935,5305 h30
  text "PWMB2" at 6015,5305 h30
  text "12+" at 6780,5100 h60
  text "+" at 1030,3480 h60
  text "-" at 1030,3370.01 h60
  text "12+" at 4860,1600 h60
  text "GND" at 5200,1600 h60
  text "12+" at 5560,1600 h60
  text "GND" at 5850,1600 h60
  text "3.3V" at 1305,1395 h30
  text "DIO" at 1435,1395 h30
  text "CLK" at 1545,1395 h30
  text "GND" at 1655,1395 h30
  text "GND" at 1835,1395 h30
  text "TX" at 1955,1395 h30
  text "RX" at 2065,1395 h30
  text "5V" at 2275,1395 h30
  text "RX" at 2375,1395 h30
  text "TX" at 2475,1395 h30
  text "GND" at 2565,1395 h30
Bottom Overlay:
Mechanical 1:
  the board outline again, w10